# EAGLE board MicroMod_Sno_Processor-Panel (EAGLE 9.5.2), part 1 of 8
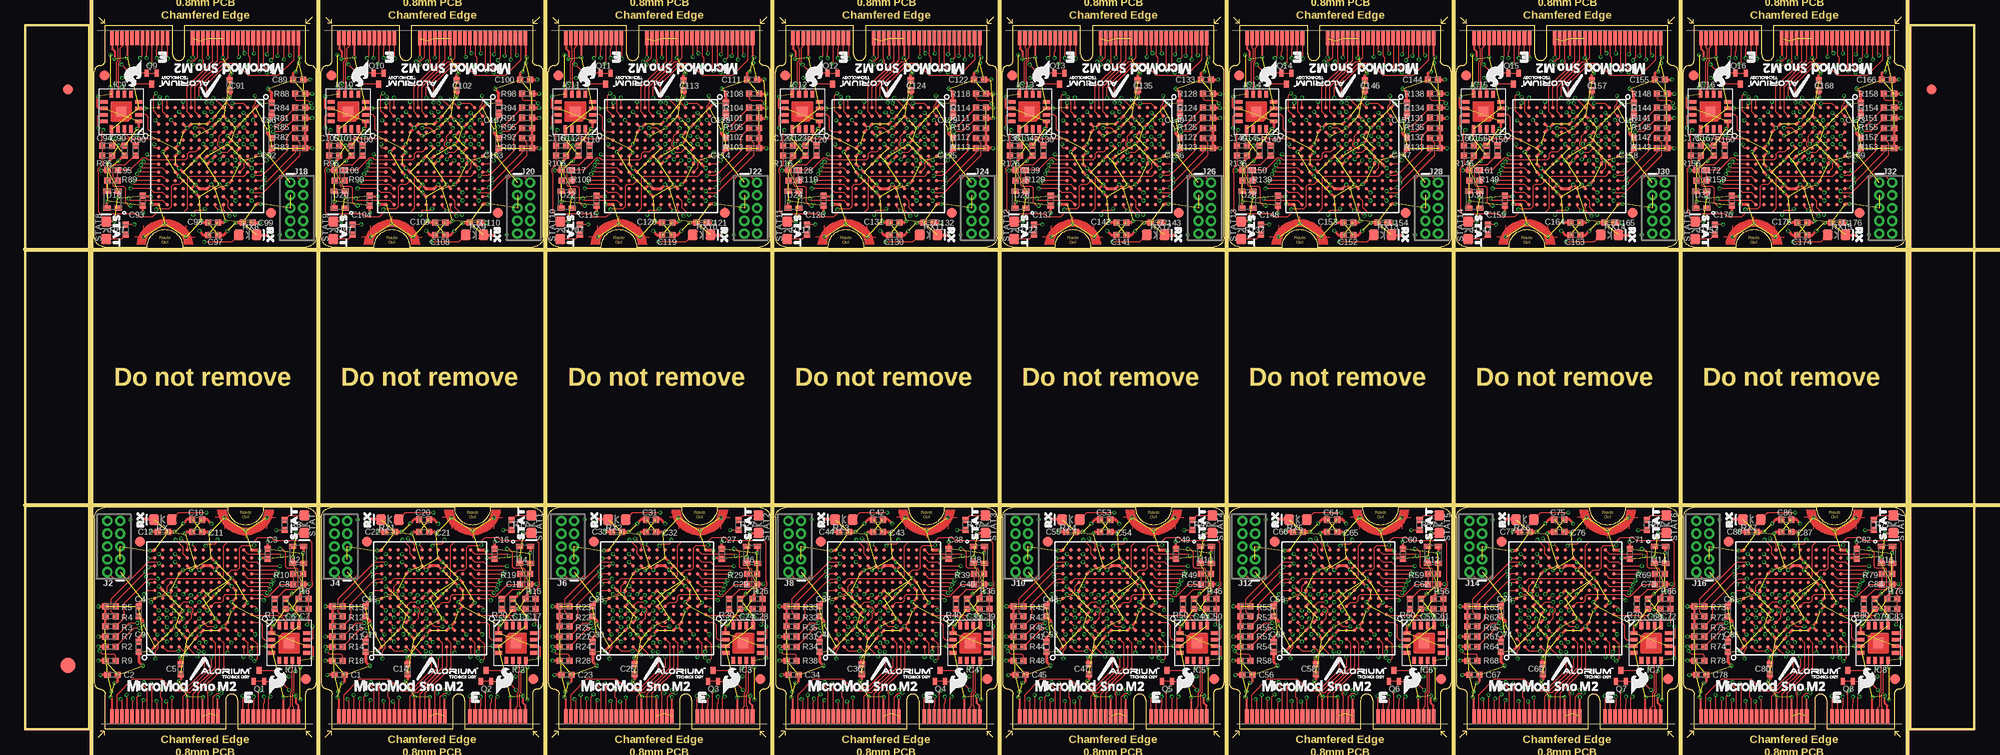
[diagram p0: board, top side]
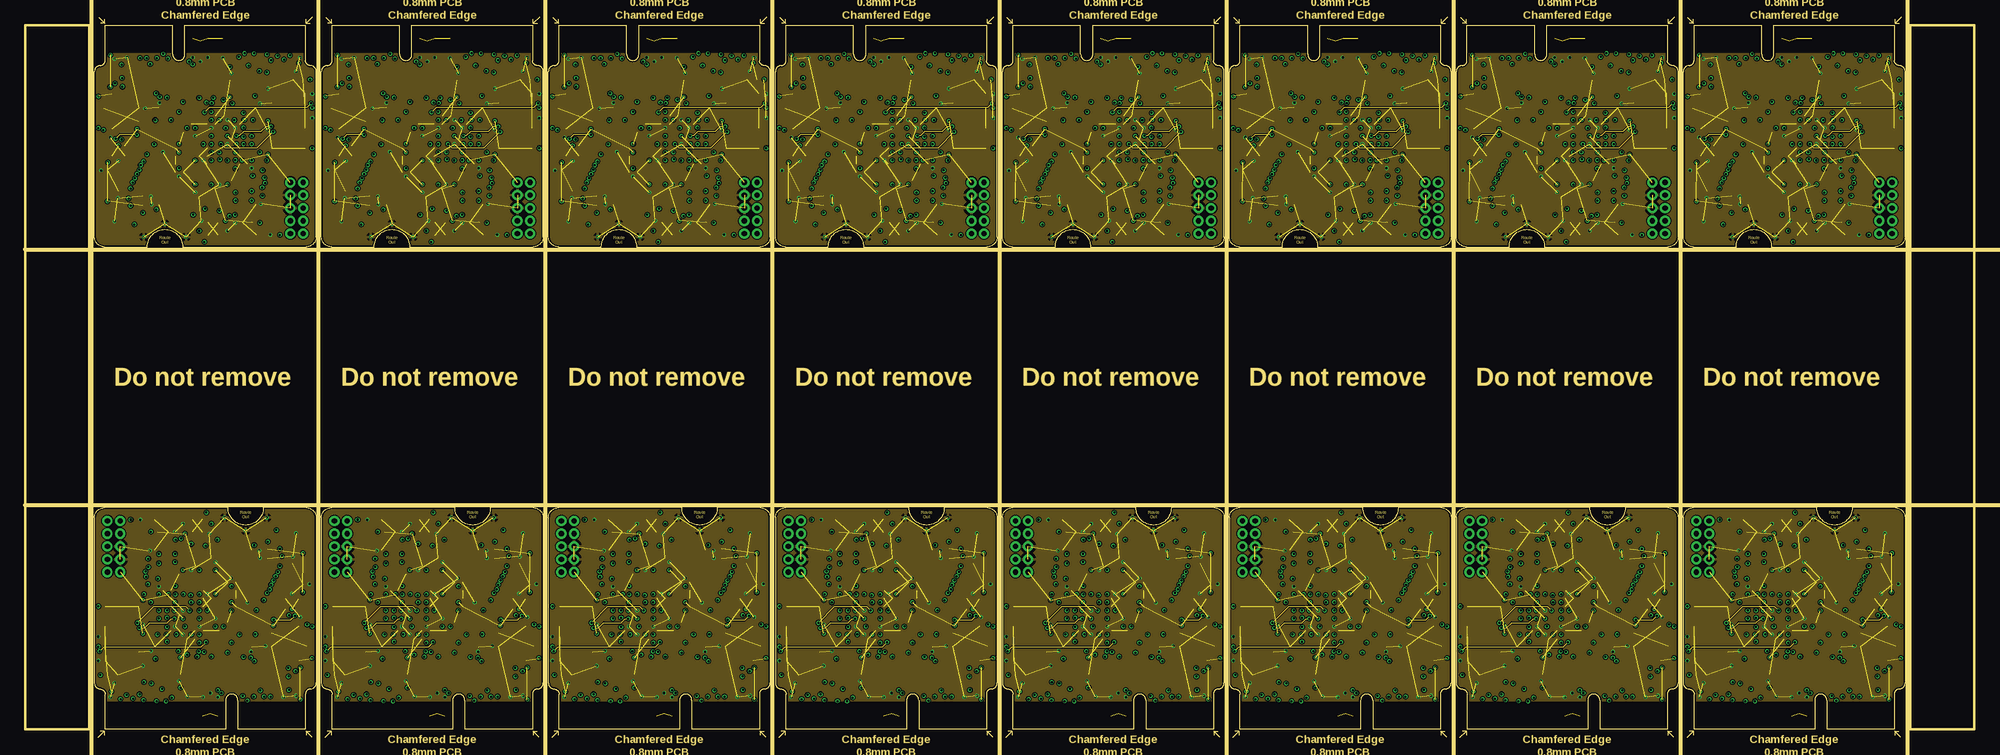
[diagram p1: board, inner layer Route2]
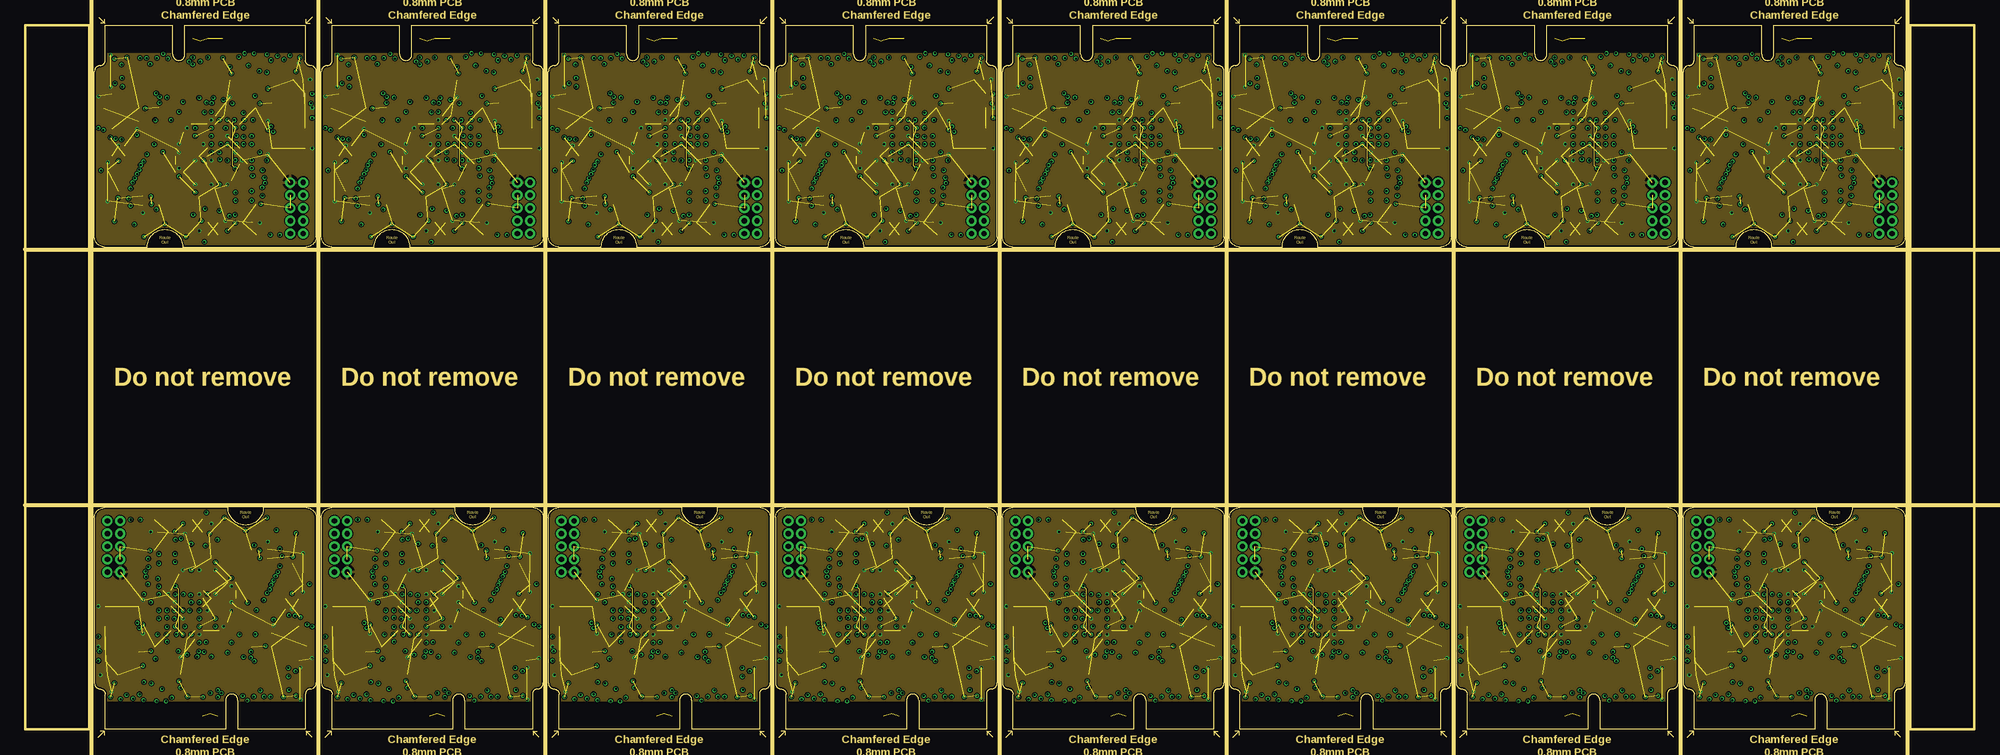
[diagram p2: board, inner layer Route15]
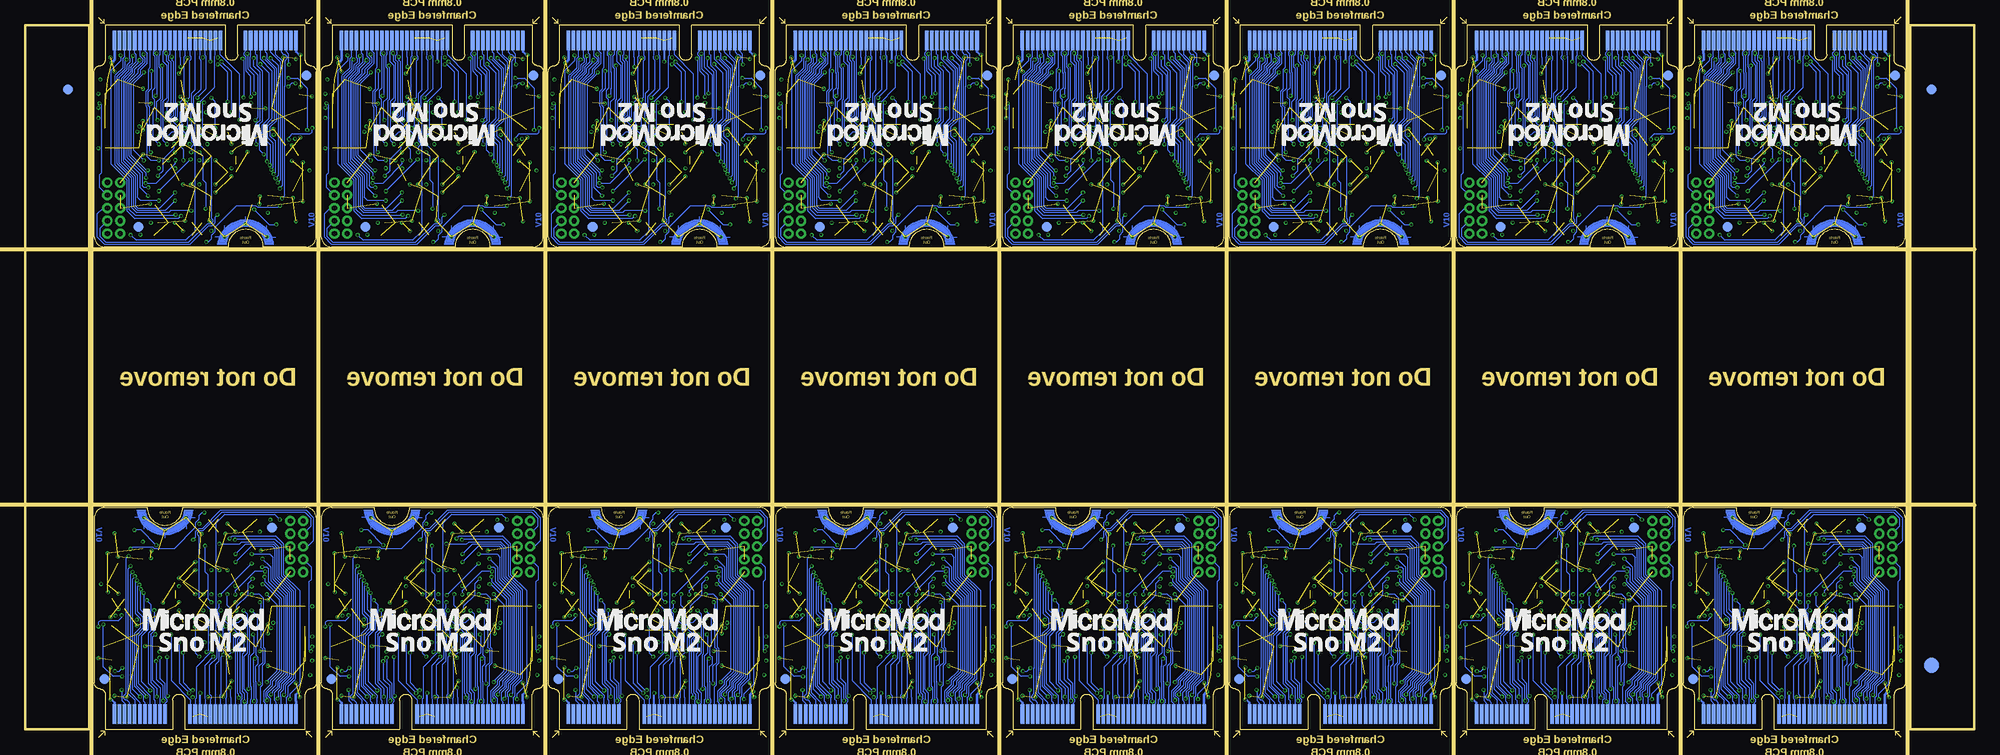
[diagram p3: board, bottom side, seen from below]

Size 193.27 x 69.85 mm. Coordinates in mm from the lower left corner, seen from the top.
Outline: 312 segments
Copper layers (1+2*15+16): Top 0.035mm / dielectric 1.5mm / Route2 0.035mm / dielectric 0.15mm / Route15 0.035mm / dielectric 0.2mm / Bottom 0.035mm
Design rules "MicroMod_Sno_Processor": minimum track width 4mil, minimum drill 0.2mm, track to track 4mil, track to pad 4mil, pad to pad 4mil, via to via 4mil, smd to smd 4mil, copper to edge 6mil, drill to drill 6mil, minimum pad ring 3mil, minimum via ring 3mil, stop-mask expansion 2.5mil, vias tented up to drill 25mil, thermal gap 10mil
Milling: 11 lines

## Footprints (pad centres in the part's own frame; a part is rotated, then mirrored left to right if it is on the bottom)
0402-TIGHT = smd 0.6 x 0.6: 1 -0.5,0; 2 0.5,0
FIDUCIAL-1X2 = smd 1 x 1: 1 0,0
FIDUCIAL-1.5X3 = smd 1.5 x 1.5: 1 0,0
QFN16 = smd 0.7 x 0.35: 1 -1.725,0.975; 2 -1.725,0.325; 3 -1.725,-0.325; 4 -1.725,-0.975; 9 1.725,-0.975; 10 1.725,-0.325; 11 1.725,0.325; 12 1.725,0.975 | smd 0.35 x 0.7: 5 -0.975,-1.725; 6 -0.325,-1.725; 7 0.325,-1.725; 8 0.975,-1.725; 13 0.975,1.725; 14 0.325,1.725; 15 -0.325,1.725; 16 -0.975,1.725 | smd 1 x 1: TAB 0,0
M.2-CARD-E-22 = smd 0.35 x 1.45: 1 9.25,1.275; 3 8.75,1.275; 5 8.25,1.275; 7 7.75,1.275; 9 7.25,1.275; 11 6.75,1.275; 13 6.25,1.275; 15 5.75,1.275; 17 5.25,1.275; 19 4.75,1.275; 21 4.25,1.275; 23 3.75,1.275; 33 1.25,1.275; 35 0.75,1.275; 37 0.25,1.275; 39 -0.25,1.275; 41 -0.75,1.275; 43 -1.25,1.275; 45 -1.75,1.275; 47 -2.25,1.275; 49 -2.75,1.275; 51 -3.25,1.275; 53 -3.75,1.275; 55 -4.25,1.275; 57 -4.75,1.275; 59 -5.25,1.275; 61 -5.75,1.275; 63 -6.25,1.275; 65 -6.75,1.275; 67 -7.25,1.275; 69 -7.75,1.275; 71 -8.25,1.275; 73 -8.75,1.275; 75 -9.25,1.275 | smd 0.35 x 1.95 bottom: 2 9,1.525; 4 8.5,1.525; 6 8,1.525; 8 7.5,1.525; 10 7,1.525; 12 6.5,1.525; 14 6,1.525; 16 5.5,1.525; 18 5,1.525; 20 4.5,1.525; 22 4,1.525; 32 1.5,1.525; 34 1,1.525; 36 0.5,1.525; 38 0,1.525; 40 -0.5,1.525; 42 -1,1.525; 44 -1.5,1.525; 46 -2,1.525; 48 -2.5,1.525; 50 -3,1.525; 52 -3.5,1.525; 54 -4,1.525; 56 -4.5,1.525; 58 -5,1.525; 60 -5.5,1.525; 62 -6,1.525; 64 -6.5,1.525; 66 -7,1.525; 68 -7.5,1.525; 70 -8,1.525; 72 -8.5,1.525; 74 -9,1.525 | drill 0.2: GND1 1.9,21; GND2 4,19.7; GND3 6.1,21
2X5-PTH-1.27MM-NO_SILK = drill 0.508 pad 1: 1 -2.54,-0.635; 2 -2.54,0.635; 3 -1.27,-0.635; 4 -1.27,0.635; 5 0,-0.635; 6 0,0.635; 7 1.27,-0.635; 8 1.27,0.635; 9 2.54,-0.635; 10 2.54,0.635
SOT-416 = smd 0.4 x 0.7: P1 -0.5,0; P2 0.5,0 | smd 0.5 x 0.7: P3 0,1.1
LED-0603 = smd 1 x 1: A -0.877,0; C 0.877,0
UBGA_169 = smd 0.34 x 0.34: A1 -9.6,0; A2 -8.8,0; A3 -8,0; A4 -7.2,0; A5 -6.4,0; A6 -5.6,0; A7 -4.8,0; A8 -4,0; A9 -3.2,0; A10 -2.4,0; A11 -1.6,0; A12 -0.8,0; A13 0,0; B1 -9.6,-0.8; B2 -8.8,-0.8; B3 -8,-0.8; B4 -7.2,-0.8; B5 -6.4,-0.8; B6 -5.6,-0.8; B7 -4.8,-0.8; B8 -4,-0.8; B9 -3.2,-0.8; B10 -2.4,-0.8; B11 -1.6,-0.8; B12 -0.8,-0.8; B13 0,-0.8; C1 -9.6,-1.6; C2 -8.8,-1.6; C3 -8,-1.6; C4 -7.2,-1.6; C5 -6.4,-1.6; C6 -5.6,-1.6; C7 -4.8,-1.6; C8 -4,-1.6; C9 -3.2,-1.6; C10 -2.4,-1.6; C11 -1.6,-1.6; C12 -0.8,-1.6; C13 0,-1.6; D1 -9.6,-2.4; D2 -8.8,-2.4; D3 -8,-2.4; D4 -7.2,-2.4; D5 -6.4,-2.4; D6 -5.6,-2.4; D7 -4.8,-2.4; D8 -4,-2.4; D9 -3.2,-2.4; D10 -2.4,-2.4; D11 -1.6,-2.4; D12 -0.8,-2.4; D13 0,-2.4; E1 -9.6,-3.2; E2 -8.8,-3.2; E3 -8,-3.2; E4 -7.2,-3.2; E5 -6.4,-3.2; E6 -5.6,-3.2; E7 -4.8,-3.2; E8 -4,-3.2; E9 -3.2,-3.2; E10 -2.4,-3.2; E11 -1.6,-3.2; E12 -0.8,-3.2; E13 0,-3.2; F1 -9.6,-4; F2 -8.8,-4; F3 -8,-4; F4 -7.2,-4; F5 -6.4,-4; F6 -5.6,-4; F7 -4.8,-4; F8 -4,-4; F9 -3.2,-4; F10 -2.4,-4; F11 -1.6,-4; F12 -0.8,-4; F13 0,-4; G1 -9.6,-4.8; G2 -8.8,-4.8; G3 -8,-4.8; G4 -7.2,-4.8; G5 -6.4,-4.8; G6 -5.6,-4.8; G7 -4.8,-4.8; G8 -4,-4.8; G9 -3.2,-4.8; G10 -2.4,-4.8; G11 -1.6,-4.8; G12 -0.8,-4.8; G13 0,-4.8; H1 -9.6,-5.6; H2 -8.8,-5.6; H3 -8,-5.6; H4 -7.2,-5.6; H5 -6.4,-5.6; H6 -5.6,-5.6; H7 -4.8,-5.6; H8 -4,-5.6; H9 -3.2,-5.6; H10 -2.4,-5.6; H11 -1.6,-5.6; H12 -0.8,-5.6; H13 0,-5.6; J1 -9.6,-6.4; J2 -8.8,-6.4; J3 -8,-6.4; J4 -7.2,-6.4; J5 -6.4,-6.4; J6 -5.6,-6.4; J7 -4.8,-6.4; J8 -4,-6.4; J9 -3.2,-6.4; J10 -2.4,-6.4; J11 -1.6,-6.4; J12 -0.8,-6.4; J13 0,-6.4; K1 -9.6,-7.2; K2 -8.8,-7.2; K3 -8,-7.2; K4 -7.2,-7.2; K5 -6.4,-7.2; K6 -5.6,-7.2; K7 -4.8,-7.2; K8 -4,-7.2; K9 -3.2,-7.2; K10 -2.4,-7.2; K11 -1.6,-7.2; K12 -0.8,-7.2; K13 0,-7.2; L1 -9.6,-8; L2 -8.8,-8; L3 -8,-8; L4 -7.2,-8; L5 -6.4,-8; L6 -5.6,-8; L7 -4.8,-8; L8 -4,-8; L9 -3.2,-8; L10 -2.4,-8; L11 -1.6,-8; L12 -0.8,-8; L13 0,-8; M1 -9.6,-8.8; M2 -8.8,-8.8; M3 -8,-8.8; M4 -7.2,-8.8; M5 -6.4,-8.8; M6 -5.6,-8.8; M7 -4.8,-8.8; M8 -4,-8.8; M9 -3.2,-8.8; M10 -2.4,-8.8; M11 -1.6,-8.8; M12 -0.8,-8.8; M13 0,-8.8; N1 -9.6,-9.6; N2 -8.8,-9.6; N3 -8,-9.6; N4 -7.2,-9.6; N5 -6.4,-9.6; N6 -5.6,-9.6; N7 -4.8,-9.6; N8 -4,-9.6; N9 -3.2,-9.6; N10 -2.4,-9.6; N11 -1.6,-9.6; N12 -0.8,-9.6; N13 0,-9.6
SMD20X16 = smd 0.5 x 0.7: 1 -0.85,-0.55; 2 0.85,-0.55; 3 0.85,0.55; 4 -0.85,0.55

## Placement (x,y rotation side)
C1  10uF  [0402-TIGHT]  31.16,5.4 0 top
C2  10uF  [0402-TIGHT]  8.66,5.4 0 top
C3  0.1uF  [0402-TIGHT]  24.06,17.4 270 top
C4  0.1uF  [0402-TIGHT]  11.26,11.7 270 top
C5  0.1uF  [0402-TIGHT]  15.43,5.96 270 top
C6  0.1uF  [0402-TIGHT]  25.85,12.45 90 top
C7  0.1uF  [0402-TIGHT]  27.6,11.95 180 top
C8  0.5pF  [0402-TIGHT]  27.06,14.4 0 top
C9  0.1uF  [0402-TIGHT]  11.26,8.2 270 top
C10  0.1uF  [0402-TIGHT]  17.06,20.8 180 top
C11  0.1uF  [0402-TIGHT]  17.06,19.6 0 top
C12  0.1uF  [0402-TIGHT]  13.66,19.6 0 top
C13  0.1uF  [0402-TIGHT]  48.36,12.45 90 top
C14  0.1uF  [0402-TIGHT]  37.94,5.96 270 top
C15  0.1uF  [0402-TIGHT]  33.76,11.7 270 top
C16  0.1uF  [0402-TIGHT]  46.56,17.4 270 top
C17  0.1uF  [0402-TIGHT]  50.11,11.95 180 top
C18  0.5pF  [0402-TIGHT]  49.56,14.4 0 top
C19  0.1uF  [0402-TIGHT]  33.76,8.2 270 top
C20  0.1uF  [0402-TIGHT]  39.56,20.8 180 top
C21  0.1uF  [0402-TIGHT]  39.56,19.6 0 top
C22  0.1uF  [0402-TIGHT]  36.16,19.6 0 top
C23  10uF  [0402-TIGHT]  53.67,5.4 0 top
C24  0.1uF  [0402-TIGHT]  70.87,12.45 90 top
C25  0.1uF  [0402-TIGHT]  60.45,5.96 270 top
C26  0.1uF  [0402-TIGHT]  56.27,11.7 270 top
C27  0.1uF  [0402-TIGHT]  69.07,17.4 270 top
C28  0.1uF  [0402-TIGHT]  72.62,11.95 180 top
C29  0.5pF  [0402-TIGHT]  72.07,14.4 0 top
C30  0.1uF  [0402-TIGHT]  56.27,8.2 270 top
C31  0.1uF  [0402-TIGHT]  62.07,20.8 180 top
C32  0.1uF  [0402-TIGHT]  62.07,19.6 0 top
C33  0.1uF  [0402-TIGHT]  58.67,19.6 0 top
C34  10uF  [0402-TIGHT]  76.18,5.4 0 top
C35  0.1uF  [0402-TIGHT]  93.37,12.45 90 top
C36  0.1uF  [0402-TIGHT]  82.95,5.96 270 top
C37  0.1uF  [0402-TIGHT]  78.78,11.7 270 top
C38  0.1uF  [0402-TIGHT]  91.58,17.4 270 top
C39  0.1uF  [0402-TIGHT]  95.12,11.95 180 top
C40  0.5pF  [0402-TIGHT]  94.58,14.4 0 top
C41  0.1uF  [0402-TIGHT]  78.78,8.2 270 top
C42  0.1uF  [0402-TIGHT]  84.58,20.8 180 top
C43  0.1uF  [0402-TIGHT]  84.58,19.6 0 top
C44  0.1uF  [0402-TIGHT]  81.18,19.6 0 top
C45  10uF  [0402-TIGHT]  98.69,5.4 0 top
C46  0.1uF  [0402-TIGHT]  115.88,12.45 90 top
C47  0.1uF  [0402-TIGHT]  105.46,5.96 270 top
C48  0.1uF  [0402-TIGHT]  101.29,11.7 270 top
C49  0.1uF  [0402-TIGHT]  114.09,17.4 270 top
C50  0.1uF  [0402-TIGHT]  117.63,11.95 180 top
C51  0.5pF  [0402-TIGHT]  117.09,14.4 0 top
C52  0.1uF  [0402-TIGHT]  101.29,8.2 270 top
C53  0.1uF  [0402-TIGHT]  107.09,20.8 180 top
C54  0.1uF  [0402-TIGHT]  107.09,19.6 0 top
C55  0.1uF  [0402-TIGHT]  103.69,19.6 0 top
C56  10uF  [0402-TIGHT]  121.2,5.4 0 top
C57  0.1uF  [0402-TIGHT]  138.39,12.45 90 top
C58  0.1uF  [0402-TIGHT]  127.97,5.96 270 top
C59  0.1uF  [0402-TIGHT]  123.8,11.7 270 top
C60  0.1uF  [0402-TIGHT]  136.6,17.4 270 top
C61  0.1uF  [0402-TIGHT]  140.14,11.95 180 top
C62  0.5pF  [0402-TIGHT]  139.6,14.4 0 top
C63  0.1uF  [0402-TIGHT]  123.8,8.2 270 top
C64  0.1uF  [0402-TIGHT]  129.6,20.8 180 top
C65  0.1uF  [0402-TIGHT]  129.6,19.6 0 top
C66  0.1uF  [0402-TIGHT]  126.2,19.6 0 top
C67  10uF  [0402-TIGHT]  143.71,5.4 0 top
C68  0.1uF  [0402-TIGHT]  160.9,12.45 90 top
C69  0.1uF  [0402-TIGHT]  150.48,5.96 270 top
C70  0.1uF  [0402-TIGHT]  146.31,11.7 270 top
C71  0.1uF  [0402-TIGHT]  159.11,17.4 270 top
C72  0.1uF  [0402-TIGHT]  162.65,11.95 180 top
C73  0.5pF  [0402-TIGHT]  162.11,14.4 0 top
C74  0.1uF  [0402-TIGHT]  146.31,8.2 270 top
C75  0.1uF  [0402-TIGHT]  152.11,20.8 180 top
C76  0.1uF  [0402-TIGHT]  152.11,19.6 0 top
C77  0.1uF  [0402-TIGHT]  148.71,19.6 0 top
C78  10uF  [0402-TIGHT]  166.21,5.4 0 top
C79  0.1uF  [0402-TIGHT]  183.41,12.45 90 top
C80  0.1uF  [0402-TIGHT]  172.99,5.96 270 top
C81  0.1uF  [0402-TIGHT]  168.81,11.7 270 top
C82  0.1uF  [0402-TIGHT]  181.61,17.4 270 top
C83  0.1uF  [0402-TIGHT]  185.16,11.95 180 top
C84  0.5pF  [0402-TIGHT]  184.61,14.4 0 top
C85  0.1uF  [0402-TIGHT]  168.81,8.2 270 top
C86  0.1uF  [0402-TIGHT]  174.61,20.8 180 top
C87  0.1uF  [0402-TIGHT]  174.61,19.6 0 top
C88  0.1uF  [0402-TIGHT]  171.21,19.6 0 top
C89  10uF  [0402-TIGHT]  27.06,64.45 180 top
C90  0.1uF  [0402-TIGHT]  9.86,57.4 270 top
C91  0.1uF  [0402-TIGHT]  20.29,63.89 90 top
C92  0.1uF  [0402-TIGHT]  24.46,58.15 90 top
C93  0.1uF  [0402-TIGHT]  11.66,52.45 90 top
C94  0.1uF  [0402-TIGHT]  8.11,57.9 0 top
C95  0.5pF  [0402-TIGHT]  8.66,55.45 180 top
C96  0.1uF  [0402-TIGHT]  24.46,61.65 90 top
C97  0.1uF  [0402-TIGHT]  18.66,49.05 0 top
C98  0.1uF  [0402-TIGHT]  18.66,50.25 180 top
C99  0.1uF  [0402-TIGHT]  22.06,50.25 180 top
C100  10uF  [0402-TIGHT]  49.57,64.45 180 top
C101  0.1uF  [0402-TIGHT]  32.37,57.4 270 top
C102  0.1uF  [0402-TIGHT]  42.8,63.89 90 top
C103  0.1uF  [0402-TIGHT]  46.97,58.15 90 top
C104  0.1uF  [0402-TIGHT]  34.17,52.45 90 top
C105  0.1uF  [0402-TIGHT]  30.62,57.9 0 top
C106  0.5pF  [0402-TIGHT]  31.17,55.45 180 top
C107  0.1uF  [0402-TIGHT]  46.97,61.65 90 top
C108  0.1uF  [0402-TIGHT]  41.17,49.05 0 top
C109  0.1uF  [0402-TIGHT]  41.17,50.25 180 top
C110  0.1uF  [0402-TIGHT]  44.57,50.25 180 top
C111  10uF  [0402-TIGHT]  72.07,64.45 180 top
C112  0.1uF  [0402-TIGHT]  54.88,57.4 270 top
C113  0.1uF  [0402-TIGHT]  65.3,63.89 90 top
C114  0.1uF  [0402-TIGHT]  69.47,58.15 90 top
C115  0.1uF  [0402-TIGHT]  56.67,52.45 90 top
C116  0.1uF  [0402-TIGHT]  53.13,57.9 0 top
C117  0.5pF  [0402-TIGHT]  53.67,55.45 180 top
C118  0.1uF  [0402-TIGHT]  69.47,61.65 90 top
C119  0.1uF  [0402-TIGHT]  63.67,49.05 0 top
C120  0.1uF  [0402-TIGHT]  63.67,50.25 180 top
C121  0.1uF  [0402-TIGHT]  67.07,50.25 180 top
C122  10uF  [0402-TIGHT]  94.58,64.45 180 top
C123  0.1uF  [0402-TIGHT]  77.39,57.4 270 top
C124  0.1uF  [0402-TIGHT]  87.81,63.89 90 top
C125  0.1uF  [0402-TIGHT]  91.98,58.15 90 top
C126  0.1uF  [0402-TIGHT]  79.18,52.45 90 top
C127  0.1uF  [0402-TIGHT]  75.64,57.9 0 top
C128  0.5pF  [0402-TIGHT]  76.18,55.45 180 top
C129  0.1uF  [0402-TIGHT]  91.98,61.65 90 top
C130  0.1uF  [0402-TIGHT]  86.18,49.05 0 top
C131  0.1uF  [0402-TIGHT]  86.18,50.25 180 top
C132  0.1uF  [0402-TIGHT]  89.58,50.25 180 top
C133  10uF  [0402-TIGHT]  117.09,64.45 180 top
C134  0.1uF  [0402-TIGHT]  99.9,57.4 270 top
C135  0.1uF  [0402-TIGHT]  110.32,63.89 90 top
C136  0.1uF  [0402-TIGHT]  114.49,58.15 90 top
C137  0.1uF  [0402-TIGHT]  101.69,52.45 90 top
C138  0.1uF  [0402-TIGHT]  98.15,57.9 0 top
C139  0.5pF  [0402-TIGHT]  98.69,55.45 180 top
C140  0.1uF  [0402-TIGHT]  114.49,61.65 90 top
C141  0.1uF  [0402-TIGHT]  108.69,49.05 0 top
C142  0.1uF  [0402-TIGHT]  108.69,50.25 180 top
C143  0.1uF  [0402-TIGHT]  112.09,50.25 180 top
C144  10uF  [0402-TIGHT]  139.6,64.45 180 top
C145  0.1uF  [0402-TIGHT]  122.41,57.4 270 top
C146  0.1uF  [0402-TIGHT]  132.83,63.89 90 top
C147  0.1uF  [0402-TIGHT]  137,58.15 90 top
C148  0.1uF  [0402-TIGHT]  124.2,52.45 90 top
C149  0.1uF  [0402-TIGHT]  120.66,57.9 0 top
C150  0.5pF  [0402-TIGHT]  121.2,55.45 180 top
C151  0.1uF  [0402-TIGHT]  137,61.65 90 top
C152  0.1uF  [0402-TIGHT]  131.2,49.05 0 top
C153  0.1uF  [0402-TIGHT]  131.2,50.25 180 top
C154  0.1uF  [0402-TIGHT]  134.6,50.25 180 top
C155  10uF  [0402-TIGHT]  162.11,64.45 180 top
C156  0.1uF  [0402-TIGHT]  144.91,57.4 270 top
C157  0.1uF  [0402-TIGHT]  155.34,63.89 90 top
C158  0.1uF  [0402-TIGHT]  159.51,58.15 90 top
C159  0.1uF  [0402-TIGHT]  146.71,52.45 90 top
C160  0.1uF  [0402-TIGHT]  143.16,57.9 0 top
C161  0.5pF  [0402-TIGHT]  143.71,55.45 180 top
C162  0.1uF  [0402-TIGHT]  159.51,61.65 90 top
C163  0.1uF  [0402-TIGHT]  153.71,49.05 0 top
C164  0.1uF  [0402-TIGHT]  153.71,50.25 180 top
C165  0.1uF  [0402-TIGHT]  157.11,50.25 180 top
C166  10uF  [0402-TIGHT]  184.61,64.45 180 top
C167  0.1uF  [0402-TIGHT]  167.42,57.4 270 top
C168  0.1uF  [0402-TIGHT]  177.84,63.89 90 top
C169  0.1uF  [0402-TIGHT]  182.01,58.15 90 top
C170  0.1uF  [0402-TIGHT]  169.21,52.45 90 top
C171  0.1uF  [0402-TIGHT]  165.67,57.9 0 top
C172  0.5pF  [0402-TIGHT]  166.21,55.45 180 top
C173  0.1uF  [0402-TIGHT]  182.01,61.65 90 top
C174  0.1uF  [0402-TIGHT]  176.21,49.05 0 top
C175  0.1uF  [0402-TIGHT]  176.21,50.25 180 top
C176  0.1uF  [0402-TIGHT]  179.61,50.25 180 top
E$1  [FIDUCIAL-1X2]  4.23,63.5 0 top
E$2  [FIDUCIAL-1X2]  4.23,63.5 0 bottom
E$3  [FIDUCIAL-1X2]  189.04,63.5 0 top
E$4  [FIDUCIAL-1X2]  189.04,63.5 0 bottom
E$5  [FIDUCIAL-1.5X3]  4.23,6.35 0 top
E$6  [FIDUCIAL-1.5X3]  4.23,6.35 0 bottom
FID1  FIDUCIAL1X2  [FIDUCIAL-1X2]  27.86,5 0 top
FID2  FIDUCIAL1X2  [FIDUCIAL-1X2]  11.36,18.6 0 top
FID3  FIDUCIAL1X2  [FIDUCIAL-1X2]  11.25,20.01 0 bottom
FID4  FIDUCIAL1X2  [FIDUCIAL-1X2]  27.87,5 0 bottom
FID5  FIDUCIAL1X2  [FIDUCIAL-1X2]  50.36,5 0 top
FID6  FIDUCIAL1X2  [FIDUCIAL-1X2]  33.86,18.6 0 top
FID7  FIDUCIAL1X2  [FIDUCIAL-1X2]  33.76,20.01 0 bottom
FID8  FIDUCIAL1X2  [FIDUCIAL-1X2]  50.38,5 0 bottom
FID9  FIDUCIAL1X2  [FIDUCIAL-1X2]  72.87,5 0 top
FID10  FIDUCIAL1X2  [FIDUCIAL-1X2]  56.37,18.6 0 top
FID11  FIDUCIAL1X2  [FIDUCIAL-1X2]  56.27,20.01 0 bottom
FID12  FIDUCIAL1X2  [FIDUCIAL-1X2]  72.89,5 0 bottom
FID13  FIDUCIAL1X2  [FIDUCIAL-1X2]  95.38,5 0 top
FID14  FIDUCIAL1X2  [FIDUCIAL-1X2]  78.88,18.6 0 top
FID15  FIDUCIAL1X2  [FIDUCIAL-1X2]  78.77,20.01 0 bottom
FID16  FIDUCIAL1X2  [FIDUCIAL-1X2]  95.4,5 0 bottom
FID17  FIDUCIAL1X2  [FIDUCIAL-1X2]  117.89,5 0 top
FID18  FIDUCIAL1X2  [FIDUCIAL-1X2]  101.39,18.6 0 top
FID19  FIDUCIAL1X2  [FIDUCIAL-1X2]  101.28,20.01 0 bottom
FID20  FIDUCIAL1X2  [FIDUCIAL-1X2]  117.91,5 0 bottom
FID21  FIDUCIAL1X2  [FIDUCIAL-1X2]  140.4,5 0 top
FID22  FIDUCIAL1X2  [FIDUCIAL-1X2]  123.9,18.6 0 top
FID23  FIDUCIAL1X2  [FIDUCIAL-1X2]  123.79,20.01 0 bottom
FID24  FIDUCIAL1X2  [FIDUCIAL-1X2]  140.41,5 0 bottom
FID25  FIDUCIAL1X2  [FIDUCIAL-1X2]  162.91,5 0 top
FID26  FIDUCIAL1X2  [FIDUCIAL-1X2]  146.41,18.6 0 top
FID27  FIDUCIAL1X2  [FIDUCIAL-1X2]  146.3,20.01 0 bottom
FID28  FIDUCIAL1X2  [FIDUCIAL-1X2]  162.92,5 0 bottom
FID29  FIDUCIAL1X2  [FIDUCIAL-1X2]  185.41,5 0 top
FID30  FIDUCIAL1X2  [FIDUCIAL-1X2]  168.91,18.6 0 top
FID31  FIDUCIAL1X2  [FIDUCIAL-1X2]  168.81,20.01 0 bottom
FID32  FIDUCIAL1X2  [FIDUCIAL-1X2]  185.43,5 0 bottom
FID33  FIDUCIAL1X2  [FIDUCIAL-1X2]  7.86,64.85 180 top
FID34  FIDUCIAL1X2  [FIDUCIAL-1X2]  24.36,51.25 180 top
FID35  FIDUCIAL1X2  [FIDUCIAL-1X2]  24.47,49.84 180 bottom
FID36  FIDUCIAL1X2  [FIDUCIAL-1X2]  7.84,64.85 180 bottom
FID37  FIDUCIAL1X2  [FIDUCIAL-1X2]  30.37,64.85 180 top
FID38  FIDUCIAL1X2  [FIDUCIAL-1X2]  46.87,51.25 180 top
FID39  FIDUCIAL1X2  [FIDUCIAL-1X2]  46.98,49.84 180 bottom
FID40  FIDUCIAL1X2  [FIDUCIAL-1X2]  30.35,64.85 180 bottom
FID41  FIDUCIAL1X2  [FIDUCIAL-1X2]  52.87,64.85 180 top
FID42  FIDUCIAL1X2  [FIDUCIAL-1X2]  69.37,51.25 180 top
FID43  FIDUCIAL1X2  [FIDUCIAL-1X2]  69.48,49.84 180 bottom
FID44  FIDUCIAL1X2  [FIDUCIAL-1X2]  52.86,64.85 180 bottom
FID45  FIDUCIAL1X2  [FIDUCIAL-1X2]  75.38,64.85 180 top
FID46  FIDUCIAL1X2  [FIDUCIAL-1X2]  91.88,51.25 180 top
FID47  FIDUCIAL1X2  [FIDUCIAL-1X2]  91.99,49.84 180 bottom
FID48  FIDUCIAL1X2  [FIDUCIAL-1X2]  75.37,64.85 180 bottom
FID49  FIDUCIAL1X2  [FIDUCIAL-1X2]  97.89,64.85 180 top
FID50  FIDUCIAL1X2  [FIDUCIAL-1X2]  114.39,51.25 180 top
FID51  FIDUCIAL1X2  [FIDUCIAL-1X2]  114.5,49.84 180 bottom
FID52  FIDUCIAL1X2  [FIDUCIAL-1X2]  97.87,64.85 180 bottom
FID53  FIDUCIAL1X2  [FIDUCIAL-1X2]  120.4,64.85 180 top
FID54  FIDUCIAL1X2  [FIDUCIAL-1X2]  136.9,51.25 180 top
FID55  FIDUCIAL1X2  [FIDUCIAL-1X2]  137.01,49.84 180 bottom
FID56  FIDUCIAL1X2  [FIDUCIAL-1X2]  120.38,64.85 180 bottom
FID57  FIDUCIAL1X2  [FIDUCIAL-1X2]  142.91,64.85 180 top
FID58  FIDUCIAL1X2  [FIDUCIAL-1X2]  159.41,51.25 180 top
FID59  FIDUCIAL1X2  [FIDUCIAL-1X2]  159.52,49.84 180 bottom
FID60  FIDUCIAL1X2  [FIDUCIAL-1X2]  142.89,64.85 180 bottom
FID61  FIDUCIAL1X2  [FIDUCIAL-1X2]  165.41,64.85 180 top
FID62  FIDUCIAL1X2  [FIDUCIAL-1X2]  181.91,51.25 180 top
FID63  FIDUCIAL1X2  [FIDUCIAL-1X2]  182.02,49.84 180 bottom
FID64  FIDUCIAL1X2  [FIDUCIAL-1X2]  165.4,64.85 180 bottom
IC1  FT230XQ  [QFN16]  26.18,8.57 0 top
IC2  FT230XQ  [QFN16]  48.69,8.57 0 top
IC3  FT230XQ  [QFN16]  71.2,8.57 0 top
IC4  FT230XQ  [QFN16]  93.7,8.57 0 top
IC5  FT230XQ  [QFN16]  116.21,8.57 0 top
IC6  FT230XQ  [QFN16]  138.72,8.57 0 top
IC7  FT230XQ  [QFN16]  161.23,8.57 0 top
IC8  FT230XQ  [QFN16]  183.74,8.57 0 top
IC9  FT230XQ  [QFN16]  9.53,61.28 180 top
IC10  FT230XQ  [QFN16]  32.04,61.28 180 top
IC11  FT230XQ  [QFN16]  54.55,61.28 180 top
IC12  FT230XQ  [QFN16]  77.06,61.28 180 top
IC13  FT230XQ  [QFN16]  99.57,61.28 180 top
IC14  FT230XQ  [QFN16]  122.08,61.28 180 top
IC15  FT230XQ  [QFN16]  144.58,61.28 180 top
IC16  FT230XQ  [QFN16]  167.09,61.28 180 top
J1  MICROMOD-2222  [M.2-CARD-E-22]  17.86,0 0 top
J2  CORTEX_JTAG_DEBUG_PTH_NS  [2X5-PTH-1.27MM-NO_SILK]  8.79,18.14 90 top
J3  MICROMOD-2222  [M.2-CARD-E-22]  40.36,0 0 top
J4  CORTEX_JTAG_DEBUG_PTH_NS  [2X5-PTH-1.27MM-NO_SILK]  31.29,18.14 90 top
J5  MICROMOD-2222  [M.2-CARD-E-22]  62.87,0 0 top
J6  CORTEX_JTAG_DEBUG_PTH_NS  [2X5-PTH-1.27MM-NO_SILK]  53.8,18.14 90 top
J7  MICROMOD-2222  [M.2-CARD-E-22]  85.38,0 0 top
J8  CORTEX_JTAG_DEBUG_PTH_NS  [2X5-PTH-1.27MM-NO_SILK]  76.31,18.14 90 top
J9  MICROMOD-2222  [M.2-CARD-E-22]  107.89,0 0 top
J10  CORTEX_JTAG_DEBUG_PTH_NS  [2X5-PTH-1.27MM-NO_SILK]  98.82,18.14 90 top
J11  MICROMOD-2222  [M.2-CARD-E-22]  130.4,0 0 top
J12  CORTEX_JTAG_DEBUG_PTH_NS  [2X5-PTH-1.27MM-NO_SILK]  121.33,18.14 90 top
J13  MICROMOD-2222  [M.2-CARD-E-22]  152.91,0 0 top
J14  CORTEX_JTAG_DEBUG_PTH_NS  [2X5-PTH-1.27MM-NO_SILK]  143.84,18.14 90 top
J15  MICROMOD-2222  [M.2-CARD-E-22]  175.41,0 0 top
J16  CORTEX_JTAG_DEBUG_PTH_NS  [2X5-PTH-1.27MM-NO_SILK]  166.34,18.14 90 top
J17  MICROMOD-2222  [M.2-CARD-E-22]  17.86,69.85 180 top
J18  CORTEX_JTAG_DEBUG_PTH_NS  [2X5-PTH-1.27MM-NO_SILK]  26.93,51.71 270 top
J19  MICROMOD-2222  [M.2-CARD-E-22]  40.37,69.85 180 top
J20  CORTEX_JTAG_DEBUG_PTH_NS  [2X5-PTH-1.27MM-NO_SILK]  49.44,51.71 270 top
J21  MICROMOD-2222  [M.2-CARD-E-22]  62.87,69.85 180 top
J22  CORTEX_JTAG_DEBUG_PTH_NS  [2X5-PTH-1.27MM-NO_SILK]  71.95,51.71 270 top
J23  MICROMOD-2222  [M.2-CARD-E-22]  85.38,69.85 180 top
J24  CORTEX_JTAG_DEBUG_PTH_NS  [2X5-PTH-1.27MM-NO_SILK]  94.45,51.71 270 top
J25  MICROMOD-2222  [M.2-CARD-E-22]  107.89,69.85 180 top
J26  CORTEX_JTAG_DEBUG_PTH_NS  [2X5-PTH-1.27MM-NO_SILK]  116.96,51.71 270 top
J27  MICROMOD-2222  [M.2-CARD-E-22]  130.4,69.85 180 top
J28  CORTEX_JTAG_DEBUG_PTH_NS  [2X5-PTH-1.27MM-NO_SILK]  139.47,51.71 270 top
J29  MICROMOD-2222  [M.2-CARD-E-22]  152.91,69.85 180 top
J30  CORTEX_JTAG_DEBUG_PTH_NS  [2X5-PTH-1.27MM-NO_SILK]  161.98,51.71 270 top
J31  MICROMOD-2222  [M.2-CARD-E-22]  175.41,69.85 180 top
J32  CORTEX_JTAG_DEBUG_PTH_NS  [2X5-PTH-1.27MM-NO_SILK]  184.49,51.71 270 top
LOGO1  SFE_LOGO_FLAME.1_INCH  [SFE_LOGO_FLAME_.1]  47.53,4.83 0 top
LOGO2  SFE_LOGO_FLAME.1_INCH  [SFE_LOGO_FLAME_.1]  25.02,4.83 0 top
LOGO3  SFE_LOGO_FLAME.1_INCH  [SFE_LOGO_FLAME_.1]  70.04,4.83 0 top
LOGO4  SFE_LOGO_FLAME.1_INCH  [SFE_LOGO_FLAME_.1]  92.54,4.83 0 top
LOGO5  SFE_LOGO_FLAME.1_INCH  [SFE_LOGO_FLAME_.1]  115.05,4.83 0 top
LOGO6  SFE_LOGO_FLAME.1_INCH  [SFE_LOGO_FLAME_.1]  137.56,4.83 0 top
LOGO7  SFE_LOGO_FLAME.1_INCH  [SFE_LOGO_FLAME_.1]  160.07,4.83 0 top
LOGO8  SFE_LOGO_FLAME.1_INCH  [SFE_LOGO_FLAME_.1]  182.58,4.83 0 top
LOGO9  SFE_LOGO_FLAME.1_INCH  [SFE_LOGO_FLAME_.1]  10.7,65.02 180 top
LOGO10  SFE_LOGO_FLAME.1_INCH  [SFE_LOGO_FLAME_.1]  33.21,65.02 180 top
LOGO11  SFE_LOGO_FLAME.1_INCH  [SFE_LOGO_FLAME_.1]  55.71,65.02 180 top
LOGO12  SFE_LOGO_FLAME.1_INCH  [SFE_LOGO_FLAME_.1]  78.22,65.02 180 top
LOGO13  SFE_LOGO_FLAME.1_INCH  [SFE_LOGO_FLAME_.1]  100.73,65.02 180 top
LOGO14  SFE_LOGO_FLAME.1_INCH  [SFE_LOGO_FLAME_.1]  123.24,65.02 180 top
LOGO15  SFE_LOGO_FLAME.1_INCH  [SFE_LOGO_FLAME_.1]  145.75,65.02 180 top
LOGO16  SFE_LOGO_FLAME.1_INCH  [SFE_LOGO_FLAME_.1]  168.25,65.02 180 top
Q1  20V/0.1A  [SOT-416]  23.18,4.76 0 top
Q2  20V/0.1A  [SOT-416]  45.69,4.76 0 top
Q3  20V/0.1A  [SOT-416]  68.2,4.76 0 top
Q4  20V/0.1A  [SOT-416]  90.7,4.76 0 top
Q5  20V/0.1A  [SOT-416]  113.21,4.76 0 top
Q6  20V/0.1A  [SOT-416]  135.72,4.76 0 top
Q7  20V/0.1A  [SOT-416]  158.23,4.76 0 top
Q8  20V/0.1A  [SOT-416]  180.73,4.76 0 top
Q9  20V/0.1A  [SOT-416]  12.54,65.08 180 top
Q10  20V/0.1A  [SOT-416]  35.05,65.08 180 top
Q11  20V/0.1A  [SOT-416]  57.55,65.08 180 top
Q12  20V/0.1A  [SOT-416]  80.06,65.08 180 top
Q13  20V/0.1A  [SOT-416]  102.57,65.08 180 top
Q14  20V/0.1A  [SOT-416]  125.08,65.08 180 top
Q15  20V/0.1A  [SOT-416]  147.59,65.08 180 top
Q16  20V/0.1A  [SOT-416]  170.09,65.08 180 top
R1  1k  [0402-TIGHT]  24.76,12.45 270 top
R2  1k  [0402-TIGHT]  8.46,8.2 180 top
R3  1k  [0402-TIGHT]  8.46,10.2 180 top
R4  5.1k  [0402-TIGHT]  8.46,11.2 180 top
R5  5.1k  [0402-TIGHT]  8.46,12.2 180 top
R6  5.1k  [0402-TIGHT]  27.6,12.93 180 top
R7  1k  [0402-TIGHT]  8.46,9.2 180 top
R8  200  [0402-TIGHT]  25.73,20.28 270 top
R9  1k  [0402-TIGHT]  8.46,6.8 180 top
R10  22  [0402-TIGHT]  27.06,15.4 180 top
R11  1k  [0402-TIGHT]  30.96,9.2 180 top
R12  5.1k  [0402-TIGHT]  30.96,11.2 180 top
R13  5.1k  [0402-TIGHT]  30.96,12.2 180 top
R14  1k  [0402-TIGHT]  30.96,8.2 180 top
R15  1k  [0402-TIGHT]  30.96,10.2 180 top
R16  5.1k  [0402-TIGHT]  50.11,12.93 180 top
R17  200  [0402-TIGHT]  48.24,20.28 270 top
R18  1k  [0402-TIGHT]  30.96,6.8 180 top
R19  22  [0402-TIGHT]  49.56,15.4 180 top
R20  1k  [0402-TIGHT]  47.26,12.45 270 top
R21  1k  [0402-TIGHT]  53.47,9.2 180 top
R22  5.1k  [0402-TIGHT]  53.47,11.2 180 top
R23  5.1k  [0402-TIGHT]  53.47,12.2 180 top
R24  1k  [0402-TIGHT]  53.47,8.2 180 top
R25  1k  [0402-TIGHT]  53.47,10.2 180 top
R26  5.1k  [0402-TIGHT]  72.62,12.93 180 top
R27  200  [0402-TIGHT]  70.75,20.28 270 top
R28  1k  [0402-TIGHT]  53.47,6.8 180 top
R29  22  [0402-TIGHT]  72.07,15.4 180 top
R30  1k  [0402-TIGHT]  69.77,12.45 270 top
R31  1k  [0402-TIGHT]  75.98,9.2 180 top
R32  5.1k  [0402-TIGHT]  75.98,11.2 180 top
R33  5.1k  [0402-TIGHT]  75.98,12.2 180 top
R34  1k  [0402-TIGHT]  75.98,8.2 180 top
R35  1k  [0402-TIGHT]  75.98,10.2 180 top
R36  5.1k  [0402-TIGHT]  95.12,12.93 180 top
R37  200  [0402-TIGHT]  93.26,20.28 270 top
R38  1k  [0402-TIGHT]  75.98,6.8 180 top
R39  22  [0402-TIGHT]  94.58,15.4 180 top
R40  1k  [0402-TIGHT]  92.28,12.45 270 top
R41  1k  [0402-TIGHT]  98.49,9.2 180 top
R42  5.1k  [0402-TIGHT]  98.49,11.2 180 top
R43  5.1k  [0402-TIGHT]  98.49,12.2 180 top
R44  1k  [0402-TIGHT]  98.49,8.2 180 top
R45  1k  [0402-TIGHT]  98.49,10.2 180 top
R46  5.1k  [0402-TIGHT]  117.63,12.93 180 top
R47  200  [0402-TIGHT]  115.77,20.28 270 top
R48  1k  [0402-TIGHT]  98.49,6.8 180 top
R49  22  [0402-TIGHT]  117.09,15.4 180 top
R50  1k  [0402-TIGHT]  114.79,12.45 270 top
R51  1k  [0402-TIGHT]  121,9.2 180 top
R52  5.1k  [0402-TIGHT]  121,11.2 180 top
R53  5.1k  [0402-TIGHT]  121,12.2 180 top
R54  1k  [0402-TIGHT]  121,8.2 180 top
R55  1k  [0402-TIGHT]  121,10.2 180 top
R56  5.1k  [0402-TIGHT]  140.14,12.93 180 top
R57  200  [0402-TIGHT]  138.27,20.28 270 top
R58  1k  [0402-TIGHT]  121,6.8 180 top
R59  22  [0402-TIGHT]  139.6,15.4 180 top
R60  1k  [0402-TIGHT]  137.3,12.45 270 top
R61  1k  [0402-TIGHT]  143.51,9.2 180 top
R62  5.1k  [0402-TIGHT]  143.51,11.2 180 top
R63  5.1k  [0402-TIGHT]  143.51,12.2 180 top
R64  1k  [0402-TIGHT]  143.51,8.2 180 top
R65  1k  [0402-TIGHT]  143.51,10.2 180 top
R66  5.1k  [0402-TIGHT]  162.65,12.93 180 top
R67  200  [0402-TIGHT]  160.78,20.28 270 top
R68  1k  [0402-TIGHT]  143.51,6.8 180 top
R69  22  [0402-TIGHT]  162.11,15.4 180 top
R70  1k  [0402-TIGHT]  159.81,12.45 270 top
R71  1k  [0402-TIGHT]  166.01,9.2 180 top
R72  5.1k  [0402-TIGHT]  166.01,11.2 180 top
R73  5.1k  [0402-TIGHT]  166.01,12.2 180 top
R74  1k  [0402-TIGHT]  166.01,8.2 180 top
R75  1k  [0402-TIGHT]  166.01,10.2 180 top
R76  5.1k  [0402-TIGHT]  185.16,12.93 180 top
R77  200  [0402-TIGHT]  183.29,20.28 270 top
R78  1k  [0402-TIGHT]  166.01,6.8 180 top
R79  22  [0402-TIGHT]  184.61,15.4 180 top
R80  1k  [0402-TIGHT]  182.31,12.45 270 top
R81  1k  [0402-TIGHT]  27.26,60.65 0 top
R82  5.1k  [0402-TIGHT]  27.26,58.65 0 top
R83  5.1k  [0402-TIGHT]  27.26,57.65 0 top
R84  1k  [0402-TIGHT]  27.26,61.65 0 top
R85  1k  [0402-TIGHT]  27.26,59.65 0 top
R86  5.1k  [0402-TIGHT]  8.11,56.92 0 top
R87  200  [0402-TIGHT]  9.98,49.57 90 top
R88  1k  [0402-TIGHT]  27.26,63.05 0 top
R89  22  [0402-TIGHT]  8.66,54.45 0 top
R90  1k  [0402-TIGHT]  10.96,57.4 90 top
R91  1k  [0402-TIGHT]  49.77,60.65 0 top
R92  5.1k  [0402-TIGHT]  49.77,58.65 0 top
R93  5.1k  [0402-TIGHT]  49.77,57.65 0 top
R94  1k  [0402-TIGHT]  49.77,61.65 0 top
R95  1k  [0402-TIGHT]  49.77,59.65 0 top
R96  5.1k  [0402-TIGHT]  30.62,56.92 0 top
R97  200  [0402-TIGHT]  32.49,49.57 90 top
R98  1k  [0402-TIGHT]  49.77,63.05 0 top
R99  22  [0402-TIGHT]  31.17,54.45 0 top
R100  1k  [0402-TIGHT]  33.47,57.4 90 top
R101  1k  [0402-TIGHT]  72.27,60.65 0 top
R102  5.1k  [0402-TIGHT]  72.27,58.65 0 top
R103  5.1k  [0402-TIGHT]  72.27,57.65 0 top
R104  1k  [0402-TIGHT]  72.27,61.65 0 top
R105  1k  [0402-TIGHT]  72.27,59.65 0 top
R106  5.1k  [0402-TIGHT]  53.13,56.92 0 top
R107  200  [0402-TIGHT]  55,49.57 90 top
R108  1k  [0402-TIGHT]  72.27,63.05 0 top
R109  22  [0402-TIGHT]  53.67,54.45 0 top
R110  1k  [0402-TIGHT]  55.97,57.4 90 top
R111  1k  [0402-TIGHT]  94.78,60.65 0 top
R112  5.1k  [0402-TIGHT]  94.78,58.65 0 top
R113  5.1k  [0402-TIGHT]  94.78,57.65 0 top
R114  1k  [0402-TIGHT]  94.78,61.65 0 top
R115  1k  [0402-TIGHT]  94.78,59.65 0 top
R116  5.1k  [0402-TIGHT]  75.64,56.92 0 top
R117  200  [0402-TIGHT]  77.51,49.57 90 top
R118  1k  [0402-TIGHT]  94.78,63.05 0 top
R119  22  [0402-TIGHT]  76.18,54.45 0 top
R120  1k  [0402-TIGHT]  78.48,57.4 90 top
R121  1k  [0402-TIGHT]  117.29,60.65 0 top
R122  5.1k  [0402-TIGHT]  117.29,58.65 0 top
R123  5.1k  [0402-TIGHT]  117.29,57.65 0 top
R124  1k  [0402-TIGHT]  117.29,61.65 0 top
R125  1k  [0402-TIGHT]  117.29,59.65 0 top
R126  5.1k  [0402-TIGHT]  98.15,56.92 0 top
R127  200  [0402-TIGHT]  100.02,49.57 90 top
R128  1k  [0402-TIGHT]  117.29,63.05 0 top
R129  22  [0402-TIGHT]  98.69,54.45 0 top
R130  1k  [0402-TIGHT]  100.99,57.4 90 top
R131  1k  [0402-TIGHT]  139.8,60.65 0 top
R132  5.1k  [0402-TIGHT]  139.8,58.65 0 top
R133  5.1k  [0402-TIGHT]  139.8,57.65 0 top
R134  1k  [0402-TIGHT]  139.8,61.65 0 top
R135  1k  [0402-TIGHT]  139.8,59.65 0 top
R136  5.1k  [0402-TIGHT]  120.66,56.92 0 top
R137  200  [0402-TIGHT]  122.52,49.57 90 top
R138  1k  [0402-TIGHT]  139.8,63.05 0 top
R139  22  [0402-TIGHT]  121.2,54.45 0 top
R140  1k  [0402-TIGHT]  123.5,57.4 90 top
R141  1k  [0402-TIGHT]  162.31,60.65 0 top
R142  5.1k  [0402-TIGHT]  162.31,58.65 0 top
R143  5.1k  [0402-TIGHT]  162.31,57.65 0 top
R144  1k  [0402-TIGHT]  162.31,61.65 0 top
R145  1k  [0402-TIGHT]  162.31,59.65 0 top
R146  5.1k  [0402-TIGHT]  143.16,56.92 0 top
R147  200  [0402-TIGHT]  145.03,49.57 90 top
R148  1k  [0402-TIGHT]  162.31,63.05 0 top
R149  22  [0402-TIGHT]  143.71,54.45 0 top
R150  1k  [0402-TIGHT]  146.01,57.4 90 top
R151  1k  [0402-TIGHT]  184.81,60.65 0 top
R152  5.1k  [0402-TIGHT]  184.81,58.65 0 top
R153  5.1k  [0402-TIGHT]  184.81,57.65 0 top
R154  1k  [0402-TIGHT]  184.81,61.65 0 top
R155  1k  [0402-TIGHT]  184.81,59.65 0 top
R156  5.1k  [0402-TIGHT]  165.67,56.92 0 top
R157  200  [0402-TIGHT]  167.54,49.57 90 top
R158  1k  [0402-TIGHT]  184.81,63.05 0 top
R159  22  [0402-TIGHT]  166.21,54.45 0 top
R160  1k  [0402-TIGHT]  168.51,57.4 90 top
RX  Yellow  [LED-0603]  13.66,20.8 180 top
RX1  Yellow  [LED-0603]  36.16,20.8 180 top
RX2  Yellow  [LED-0603]  58.67,20.8 180 top
RX3  Yellow  [LED-0603]  81.18,20.8 180 top
RX4  Yellow  [LED-0603]  103.69,20.8 180 top
RX5  Yellow  [LED-0603]  126.2,20.8 180 top
RX6  Yellow  [LED-0603]  148.71,20.8 180 top
RX7  Yellow  [LED-0603]  171.21,20.8 180 top
RX8  Yellow  [LED-0603]  22.06,49.05 0 top
RX9  Yellow  [LED-0603]  44.57,49.05 0 top
RX10  Yellow  [LED-0603]  67.07,49.05 0 top
RX11  Yellow  [LED-0603]  89.58,49.05 0 top
RX12  Yellow  [LED-0603]  112.09,49.05 0 top
RX13  Yellow  [LED-0603]  134.6,49.05 0 top
RX14  Yellow  [LED-0603]  157.11,49.05 0 top
RX15  Yellow  [LED-0603]  179.61,49.05 0 top
STAT  BLUE  [LED-0603]  27.68,20.34 270 top
STAT1  BLUE  [LED-0603]  50.19,20.34 270 top
STAT2  BLUE  [LED-0603]  72.7,20.34 270 top
STAT3  BLUE  [LED-0603]  95.21,20.34 270 top
STAT4  BLUE  [LED-0603]  117.71,20.34 270 top
STAT5  BLUE  [LED-0603]  140.22,20.34 270 top
STAT6  BLUE  [LED-0603]  162.73,20.34 270 top
STAT7  BLUE  [LED-0603]  185.24,20.34 270 top
STAT8  BLUE  [LED-0603]  8.03,49.51 90 top
STAT9  BLUE  [LED-0603]  30.54,49.51 90 top
STAT10  BLUE  [LED-0603]  53.05,49.51 90 top
STAT11  BLUE  [LED-0603]  75.56,49.51 90 top
STAT12  BLUE  [LED-0603]  98.07,49.51 90 top
STAT13  BLUE  [LED-0603]  120.58,49.51 90 top
STAT14  BLUE  [LED-0603]  143.08,49.51 90 top
STAT15  BLUE  [LED-0603]  165.59,49.51 90 top
U1  [UBGA_169]  12.86,17.8 90 top
U2  16MHz  [SMD20X16]  27.06,17.29 270 top
U3  [UBGA_169]  35.36,17.8 90 top
U4  16MHz  [SMD20X16]  49.56,17.29 270 top
U5  [UBGA_169]  57.87,17.8 90 top
U6  16MHz  [SMD20X16]  72.07,17.29 270 top
U7  [UBGA_169]  80.38,17.8 90 top
U8  16MHz  [SMD20X16]  94.58,17.29 270 top
U9  [UBGA_169]  102.89,17.8 90 top
U10  16MHz  [SMD20X16]  117.09,17.29 270 top
U11  [UBGA_169]  125.4,17.8 90 top
U12  16MHz  [SMD20X16]  139.6,17.29 270 top
U13  [UBGA_169]  147.91,17.8 90 top
U14  16MHz  [SMD20X16]  162.11,17.29 270 top
U15  [UBGA_169]  170.41,17.8 90 top
U16  16MHz  [SMD20X16]  184.61,17.29 270 top
U17  [UBGA_169]  22.86,52.05 270 top
U18  16MHz  [SMD20X16]  8.66,52.56 90 top
U19  [UBGA_169]  45.37,52.05 270 top
U20  16MHz  [SMD20X16]  31.17,52.56 90 top
U21  [UBGA_169]  67.87,52.05 270 top
U22  16MHz  [SMD20X16]  53.67,52.56 90 top
U23  [UBGA_169]  90.38,52.05 270 top
U24  16MHz  [SMD20X16]  76.18,52.56 90 top
U25  [UBGA_169]  112.89,52.05 270 top
U26  16MHz  [SMD20X16]  98.69,52.56 90 top
U27  [UBGA_169]  135.4,52.05 270 top
U28  16MHz  [SMD20X16]  121.2,52.56 90 top
U29  [UBGA_169]  157.91,52.05 270 top
U30  16MHz  [SMD20X16]  143.71,52.56 90 top
U31  [UBGA_169]  180.41,52.05 270 top
U32  16MHz  [SMD20X16]  166.21,52.56 90 top
U$1  [STAT0]  26.67,20.45 90 top
U$2  [RX0]  11.43,20.83 90 top
U$3  [STAT0]  49.18,20.45 90 top
U$4  [RX0]  33.94,20.83 90 top
U$5  [STAT0]  71.69,20.45 90 top
U$6  [RX0]  56.45,20.83 90 top
U$7  [STAT0]  94.19,20.45 90 top
U$8  [RX0]  78.95,20.83 90 top
U$9  [STAT0]  116.7,20.45 90 top
U$10  [RX0]  101.46,20.83 90 top
U$11  [STAT0]  139.21,20.45 90 top
U$12  [RX0]  123.97,20.83 90 top
U$13  [STAT0]  161.72,20.45 90 top
U$14  [RX0]  146.48,20.83 90 top
U$15  [STAT0]  184.23,20.45 90 top
U$16  [RX0]  168.99,20.83 90 top
U$17  [STAT0]  9.04,49.4 270 top
U$18  [RX0]  24.28,49.02 270 top
U$19  [STAT0]  31.55,49.4 270 top
U$20  [RX0]  46.79,49.02 270 top
U$21  [STAT0]  54.06,49.4 270 top
U$22  [RX0]  69.3,49.02 270 top
U$23  [STAT0]  76.57,49.4 270 top
U$24  [RX0]  91.81,49.02 270 top
U$25  [STAT0]  99.08,49.4 270 top
U$26  [RX0]  114.32,49.02 270 top
U$27  [STAT0]  121.59,49.4 270 top
U$28  [RX0]  136.83,49.02 270 top
U$29  [STAT0]  144.09,49.4 270 top
U$30  [RX0]  159.33,49.02 270 top
U$31  [STAT0]  166.6,49.4 270 top
U$32  [RX0]  181.84,49.02 270 top

## Library data of the parts
C1 C2 C23 C34 C45 C56 C67 C78 C89 C100 C111 C122 C133 C144 C155 C166 = SparkFun-Capacitors; PROD_ID: CAP-14848
C3-C7 C9-C17 C19-C22 C24-C28 C30-C33 C35-C39 C41-C44 C46-C50 C52-C55 C57-C61 C63-C66 C68-C72 C74-C77 C79-C83 C85-C88 C90-C94 C96-C99 C101-C105 C107-C110 C112-C116 C118-C121 C123-C127 C129-C132 C134-C138 C140-C143 C145-C149 C151-C154 C156-C160 C162-C165 C167-C171 C173-C176 = SparkFun-Capacitors; PROD_ID: CAP-14993
C8 C18 C29 C40 C51 C62 C73 C84 C95 C106 C117 C128 C139 C150 C161 C172 = SparkFun-Capacitors; PROD_ID: CAP-14362
E$1-E$4 FID1-FID64 LOGO1-LOGO16 = SparkFun-Aesthetics
E$5 E$6 = SparkFun-Retired
IC1-IC16 = New_Parts; DIGIKEY_PART: 768-1130-2-ND; PROD_ID: IC-15930
J1 J3 J5 J7 J9 J11 J13 J15 J17 J19 J21 J23 J25 J27 J29 J31 = SparkFun-MicroMod
J2 J4 J6 J8 J10 J12 J14 J16 J18 J20 J22 J24 J26 J28 J30 J32 = SparkFun-Connectors
Q1-Q16 = New_Parts; PROD_ID: TRANS-15421
R1-R3 R7 R9 R11 R14 R15 R18 R20 R21 R24 R25 R28 R30 R31 R34 R35 R38 R40 R41 R44 R45 R48 R50 R51 R54 R55 R58 R60 R61 R64 R65 R68 R70 R71 R74 R75 R78 R80 R81 R84 R85 R88 R90 R91 R94 R95 R98 R100 R101 R104 R105 R108 R110 R111 R114 R115 R118 R120 R121 R124 R125 R128 R130 R131 R134 R135 R138 R140 R141 R144 R145 R148 R150 R151 R154 R155 R158 R160 = SparkFun-Resistors; PROD_ID: RES-14342
R4-R6 R12 R13 R16 R22 R23 R26 R32 R33 R36 R42 R43 R46 R52 R53 R56 R62 R63 R66 R72 R73 R76 R82 R83 R86 R92 R93 R96 R102 R103 R106 R112 R113 R116 R122 R123 R126 R132 R133 R136 R142 R143 R146 R152 R153 R156 = SparkFun-Resistors; PROD_ID: RES-14340
R8 R17 R27 R37 R47 R57 R67 R77 R87 R97 R107 R117 R127 R137 R147 R157 = SparkFun-Resistors; PROD_ID: RES-15550
R10 R19 R29 R39 R49 R59 R69 R79 R89 R99 R109 R119 R129 R139 R149 R159 = SparkFun-Resistors; PROD_ID: RES-12427; VALUE: 22Ω
RX RX1-RX15 = SparkFun-LED; PROD_ID: DIO-09003
STAT STAT1-STAT15 = SparkFun-LED; PROD_ID: DIO-08575
U1 U3 U5 U7 U9 U11 U13 U15 U17 U19 U21 U23 U25 U27 U29 U31 = New_Parts; DIGIKEY_PART: 544-3110-ND; PROD_ID: IC-15931
U2 U4 U6 U8 U10 U12 U14 U16 U18 U20 U22 U24 U26 U28 U30 U32 = New_Parts; PROD_ID: XTAL-16018
U$1-U$32 = output